# Altium PCB custom_pcb_layout.pcbdoc
Units mil, origin at the board's own origin, x right, y up, seen from the top; angles counter-clockwise.
Board outline 3010 x 1910 mil, 2 copper layers (Top Layer, Bottom Layer); 32 components, 17 nets, 114 pads, 42 vias.
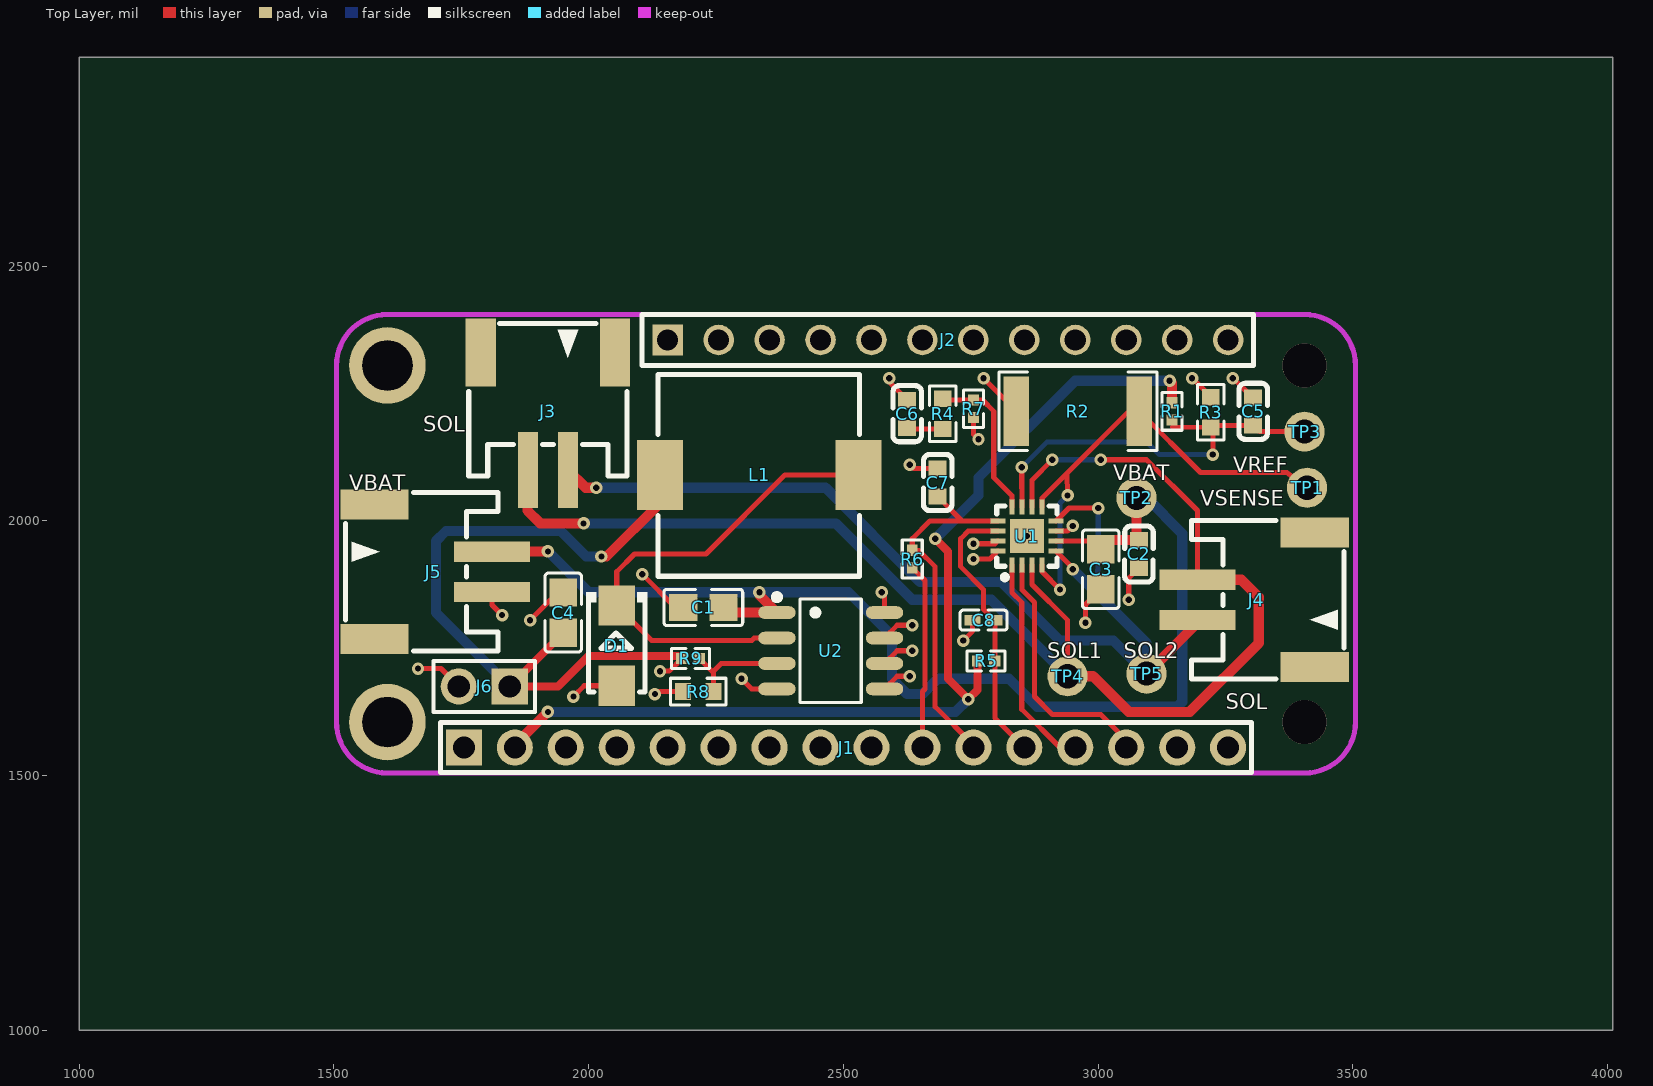
[diagram p0: Top Layer view]
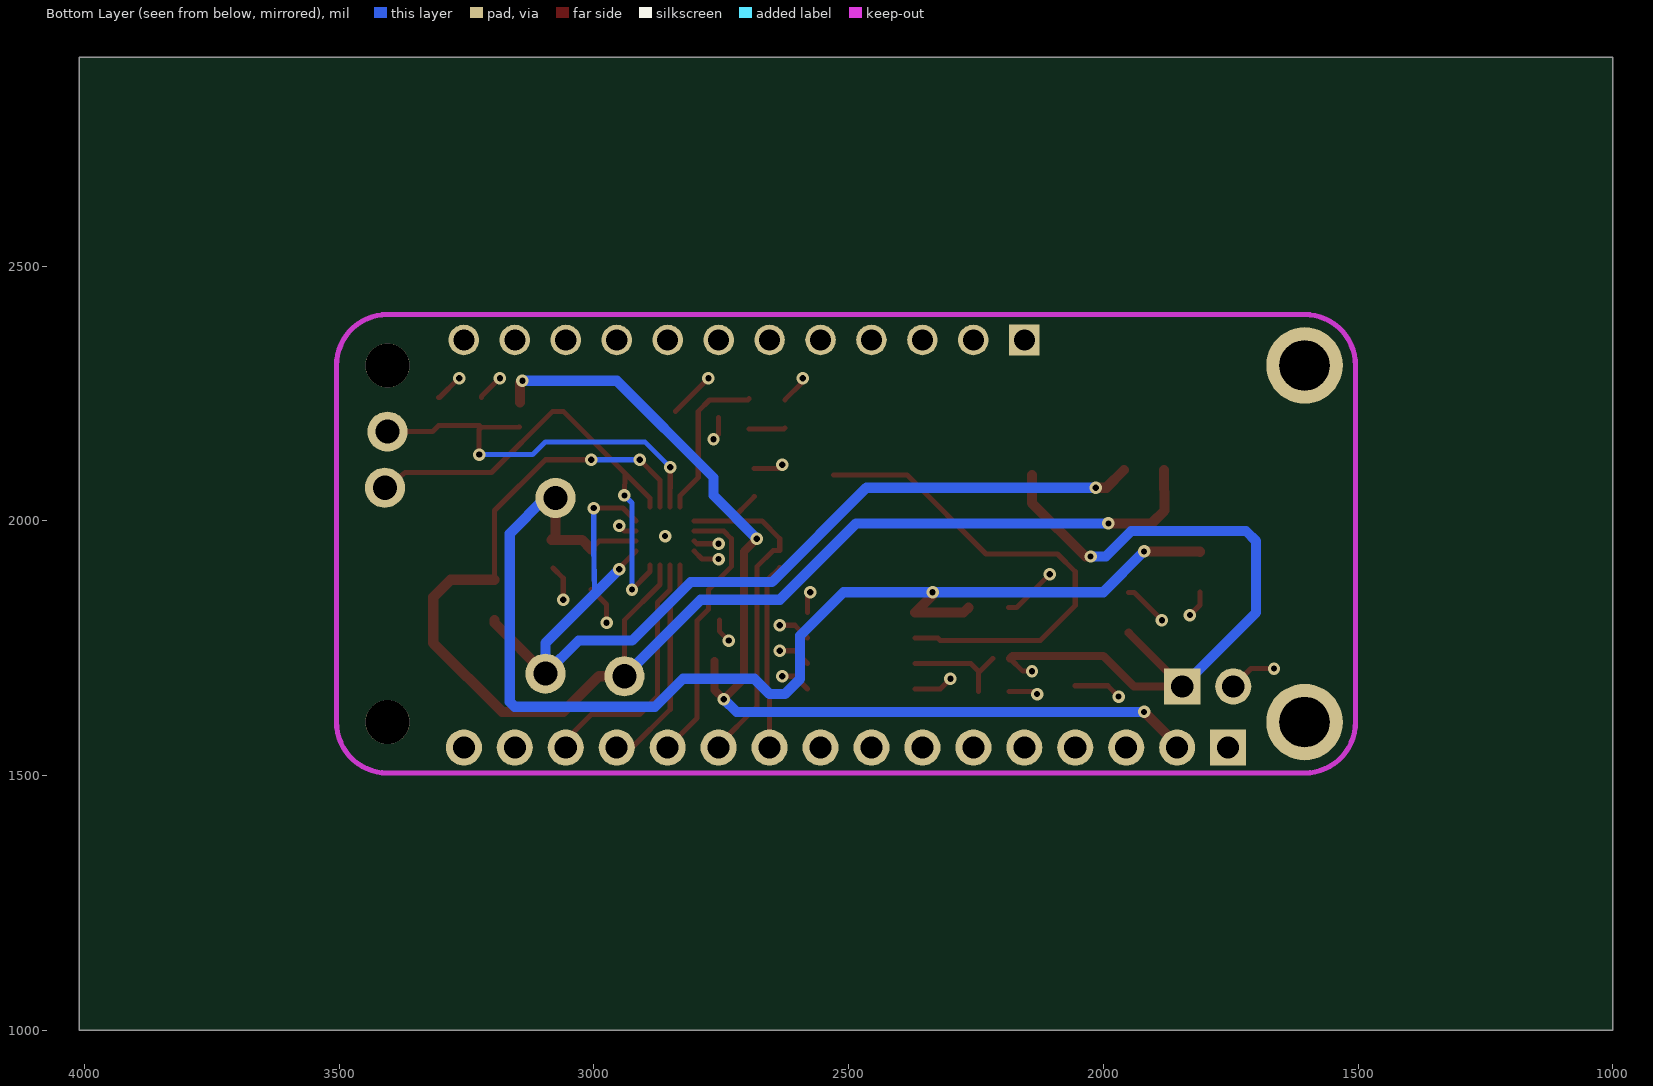
[diagram p1: Bottom Layer view, seen from below]

## Layer stack, top to bottom
Top Layer: signal copper (thickness not stored)
Dielectric: dielectric 12.6, FR-4, Dk 4.8
Bottom Layer: signal copper (thickness not stored)

## Board outline
4010,1000 1000,1000 1000,2910 4010,2910

## Components (designator, comment, footprint, x,y, rotation, side; value= is the part's Value field where it differs from the comment)
C1 "22uF" C0805 2225,1830 r180 top
C2 "2.2uF" C0603 3080,1935 r90 top
C3 "22uF" C0805 3005,1905 r90 top
C4 "22uF" C0805 1950,1820 r270 top
C5 "10nF" C0603 3304.24,2214.66 r270 top
C6 "22nF" C0603 2625,2210 r270 top
C7 "10nF" C0603 2685,2075 r270 top
C8 "1nF" C0402 2775,1805 r0 top
D1 "SS24_C908678" SMA_L4.2-W2.7-LS5.1-RD 2055,1755 r270 top
J1 "ZX-PZ2.54-1-16PZZ" HDR-TH_16P-P2.54-V-M-2 2505.04,1554.99 r0 top
J2 "2541WV-12P" HDR-TH_12P-P2.54-V-M 2705,2355 r0 top
J3 "S2B-PH-SM4-TB(LF)(SN)" CONN-SMD_P2.00_S2B-PH-SM4-TB-LF-SN 1920,2215 r180 top
J4 "S2B-PH-SM4-TB(LF)(SN)" CONN-SMD_P2.00_S2B-PH-SM4-TB-LF-SN 3310,1845 r90 top
J5 "S2B-PH-SM4-TB(LF)(SN)" CONN-SMD_P2.00_S2B-PH-SM4-TB-LF-SN 1695,1900 r270 top
J6 "PZ2.54-1*2" HDR-TH_2P-P2.54-V-M-3 1795,1675 r180 top
L1 "39uH" IND-SMD_L10.1-W10.0 2335,2090 r0 top
R1 "30kΩ" R0402 3145,2215 r90 top
R2 "330mΩ" R2512 2960,2215 r0 top
R3 "10kΩ" R0603 3220.79,2212.89 r270 top
R4 "1kΩ" R0603 2695,2210 r90 top
R5 "18kΩ" R0402 2780,1725 r180 top
R6 "18kΩ" R0402 2635,1925 r90 top
R7 "47kΩ" R0402 2755,2220 r90 top
R8 "1kΩ" R0603 2215,1665 r0 top
R9 "2.2kΩ" R0402 2200,1730 r180 top
TP1 "PG2.0-4.5-0.8T" TESTPOINT-TH_PG2.0-4.5-0.8T 3410,2065 r0 top
TP2 "PG2.0-4.5-0.8T" TESTPOINT-TH_PG2.0-4.5-0.8T 3075,2045 r0 top
TP3 "PG2.0-4.5-0.8T" TESTPOINT-TH_PG2.0-4.5-0.8T 3405,2175 r0 top
TP4 "PG2.0-4.5-0.8T" TESTPOINT-TH_PG2.0-4.5-0.8T 2940,1695 r0 top
TP5 "PG2.0-4.5-0.8T" TESTPOINT-TH_PG2.0-4.5-0.8T 3095,1700 r0 top
U1 "STSPIN250" TQFN-16_L3.0-W3.0-P0.50-BL-EP1.7 2860,1970 r0 top
U2 "AP1509-SG-13" SOP-8_L4.9-W3.9-P1.27-LS6.0-BL 2475,1745 r270 top

## Footprints (in the part's own frame and the unit in brackets; to place one, negate y for a bottom-side part, rotate by r counter-clockwise, add the part's x,y. Pads: shape width x height; smd on the part's side, far side on the other; paste and mask are expansions set on the pad)
C0402 [mm]
  rect 0.79x0.54 smd paste-100 mask+0.051: 1(-0.545,0) 2(0.545,0)
  silkscreen extent -1.17,-0.5 1.17,0.5
C0603 [mm]
  rect 0.8x0.9 smd paste+0 mask+0.051: 1(-0.7,0) 2(0.7,0)
  silkscreen extent -1.41,-0.71 1.39,0.72
C0805 [mm]
  rect 1.41x1.35 smd paste-100 mask+0.051: 1(-1,0) 2(1,0)
  silkscreen extent -1.96,-0.9 1.96,0.9
CONN-SMD_P2.00_S2B-PH-SM4-TB-LF-SN [mm]
  rect 1x3.8 smd paste+0 mask+0.051: 1(-1,2.925) 2(1,2.925)
  rect 1.5x3.4 smd paste+0 mask+0.051: 3(3.35,-2.925) 4(-3.35,-2.925)
  silkscreen extent -3.95,-4.37 3.95,3.22
HDR-TH_2P-P2.54-V-M-3 [mm]
  rect 1.8x1.8 hole 1.1 paste+0 mask+0.051: 1(-1.27,0)
  round 1.8 hole 1.1 paste+0 mask+0.051: 2(1.27,0)
  silkscreen extent -2.54,-1.27 2.54,1.27
HDR-TH_12P-P2.54-V-M [mil]
  rect 60x60 hole 41.34 paste+0 mask+2: 1(-550,0)
  round 60 hole 41.34 paste+0 mask+2: 2(-450,0) 3(-350,0) 4(-250,0) 5(-150,0) 6(-50,0) 7(50,0) 8(150,0) 9(250,0) 10(350,0) 11(450,0) 12(550,0)
  silkscreen extent -600,-50 600,50
HDR-TH_16P-P2.54-V-M-2 [mm]
  rect 1.8x1.8 hole 1.1 paste+0 mask+0.051: 1(-19.05,0)
  round 1.8 hole 1.1 paste+0 mask+0.051: 2(-16.51,0) 3(-13.97,0) 4(-11.43,0) 5(-8.89,0) 6(-6.35,0) 7(-3.81,0) 8(-1.27,0) 9(1.27,0) 10(3.81,0) 11(6.35,0) 12(8.89,0) 13(11.43,0) 14(13.97,0) 15(16.51,0) 16(19.05,0)
  silkscreen extent -20.22,-1.25 20.22,1.25
IND-SMD_L10.1-W10.0 [mm]
  rect 2.3x3.5 smd paste+0 mask+0.051: 1(-4.95,0) 2(4.95,0)
  silkscreen extent -5.05,-5.05 5,5
R0402 [mm]
  rect 0.566x0.54 smd paste-100 mask+0.051: 1(-0.433,0) 2(0.433,0)
  silkscreen extent -0.94,-0.5 0.94,0.5
R0603 [mil]
  rect 31.75x34.02 smd paste-3937.01 mask+2: 1(-29.66,0) 2(29.65,0)
  silkscreen extent -55,-26 55,26
R2512 [mil]
  rect 50.49x136.06 smd paste-3937.01 mask+2: 1(-120.72,0) 2(120.72,0)
  silkscreen extent -155,-77 155,77
SMA_L4.2-W2.7-LS5.1-RD [mm]
  rect 2x1.8 smd paste+0 mask+0.051: 1(-2,0) 2(2,0)
  silkscreen extent -2.67,-1.52 2.3,1.52
SOP-8_L4.9-W3.9-P1.27-LS6.0-BL [mm]
  oval 0.63x1.865 smd paste+0 mask+0.051: 1(-1.905,-2.682) 2(-0.635,-2.682) 3(0.635,-2.682) 4(1.905,-2.682) 5(1.905,2.682) 6(0.635,2.682) 7(-0.635,2.682) 8(-1.905,2.682)
  silkscreen extent -2.82,-2.83 2.58,1.52
TESTPOINT-TH_PG2.0-4.5-0.8T [mm]
  round 2 hole 1.2 paste+0 mask+0.05: 1(0,0)
TQFN-16_L3.0-W3.0-P0.50-BL-EP1.7 [mm]
  rect 0.25x0.75 smd paste-100 mask+0.051: 1(-0.748,-1.45) 2(-0.249,-1.45) 3(0.252,-1.45) 4(0.751,-1.45) 9(0.75,1.45) 10(0.25,1.45) 11(-0.25,1.45) 12(-0.749,1.45)
  rect 0.75x0.25 smd paste-100 mask+0.051: 5(1.45,-0.75) 6(1.45,-0.25) 7(1.45,0.25) 8(1.45,0.75) 13(-1.45,0.75) 14(-1.45,0.25) 15(-1.45,-0.25) 16(-1.45,-0.75)
  rect 1.7x1.7 smd paste-100 mask+0.051: 17(0,0)
  silkscreen extent -1.5,-2.17 1.5,1.5

## Free pads (board coordinates)
  round 150 hole 98.42 slot 98.62 at 0 deg paste+0 mask+2: P$1(1605,1605) P$1(1605,2305)
  round 86.62 hole 86.62 unplated paste+0: ""(3405,1605) ""(3405,2305)

## Via types
v1: diameter 24.41, hole 12.2, Top Layer to Bottom Layer, tented both sides, 42 vias

## Nets (pads, with @x,y where several pads share a name; then routed paths per layer and width w, separated by ;. In a path a pad name is that pad's centre, name@x,y a point inside that pad or via, vN(x,y) a via of type N, cw(c..) or ccw(c..) an arc to the next point about the centre after c; other vN are vias at no path point)
+3.3V: J1.2 R1.2 R5.2 | length 2375.6
  Top Layer w16: v1(2680,1965) 2705,1940 2705,1690 v1(2745,1650) 2762.96,1667.96 R5.2
  Top Layer w20: J1.2 1855,1560 v1(1920,1625) ; v1(3140,2275) 3145,2270 R1.2
  Bottom Layer w10: v1(1920,1625) 2272.5,1625 2285,1625
  Bottom Layer w20: v1(1920,1625) 2720,1625 v1(2745,1650) ; v1(2680,1965) 2765,2050 2765,2085 2955,2275 v1(3140,2275)
C6_2: C6.2 R4.1 | length 70.9
  Top Layer w10: C6.2 2627.1,2180.34 R4.1
D1_1: D1.1 L1.2 U2.2 | length 964.8
  Top Layer w10: U2.2 2325,1770 2320,1765 2123.74,1765 D1.1 2055,1900 2090,1935 2230,1935 2385,2090 L1.2
EN: J1.10 R6.1 | length 365.3
  Top Layer w10: R6.1@2635,1907.9 2660,1882.9 2660,1670 2655,1665 J1.10
FAULT: C7.2 J1.11 R6.2 U1.13 | length 752.1
  Top Layer w10: R6.2 2648,1942 2680,1910 2680,1635 2755,1560 J1.11 ; R6.2 2635,1965 2669.53,1999.53 U1.13 ; C7.2 2732.91,1999.53 2767.72,1999.53
GND: C1.2 C2.1 C3.1 C4.1 C5.1 C6.1 C7.1 C8.1 D1.2 J1.4 J5.2 J6.2 R2.1 R3.1 R7.1 R8.1 U1.7 U1.15 U1.16 U1.17 U2.4 U2.5 U2.6 U2.7 U2.8 | length 1502.8
  Top Layer w10: v1(1665,1710) 1710,1710 J6.2 ; J5.2 1810.16,1834.84 v1(1830,1815) ; v1(1885,1805) 1939.37,1859.37 C4.1 ; v1(1970,1655) 1991.27,1676.27 D1.2 ; v1(2105,1895) 2170,1830 C1.2 ; v1(2130,1660) 2135,1665 R8.1 ; v1(2300,1690) 2320,1670 U2.4 ; v1(2575,1860) 2580.61,1854.39 U2.8 ; U2.5 2605.61,1695 v1(2630,1695) ; U2.6 2605.61,1745 v1(2635,1745) ; U2.7 2605.61,1795 v1(2635,1795) ; v1(2590,2280) 2590,2272.56 C6.1 ; v1(2630,2110) 2637.44,2102.56 C7.1 ; v1(2735,1765) 2753.54,1783.54 C8.1 ; v1(2755,1925) 2787.44,1925 U1.16 ; v1(2755,1955) 2797.76,1955 U1.15 ; R7.1 2755,2170 v1(2765,2160) ; v1(2775,2280) 2839.28,2215.72 R2.1 ; U1.7 2939.85,1979.85 v1(2950,1990) ; v1(2975,1800) 2975,1835.63 C3.1 ; v1(3060,1845) 3060,1887.44 C2.1 ; v1@3185,2280 3220.79,2244.21 R3.1 ; v1@3265,2280 3302.79,2242.21 C5.1
  other v1: 2860.01,1970 3184.24,2279.66 3264.24,2279.66
PH: J1.13 U1.1 | length 427
  Top Layer w10: U1.1 2830.54,1859.46 2850,1840 2850,1630 2925,1555 J1.13
PWM: J1.14 U1.2 | length 498.4
  Top Layer w10: U1.2 2850.22,1864.78 2875,1840 2875,1655 2910,1620 3005,1620 3055,1570 J1.14
SOL_1: J3.2 J4.2 TP4.1 U1.3 U1.10 | length 2777.2
  Top Layer w10: U1.10 2869.84,2079.84 v1(2910,2120) ; U1.3 2869.91,1875.09 2940,1805 TP4.1 ; v1(3005,2120) 3095,2120 3194.84,2020.16 J4.2
  Top Layer w20: J3.2 1880,2020 1905,1995 v1(1990,1995) ; TP4.1 2990,1695 3060,1625 3180,1625 3315,1760 3315,1850 3280.63,1884.37 J4.2
  Bottom Layer w10: v1(2910,2120) v1(3005,2120)
  Bottom Layer w20: v1(1990,1995) 2485,1995 2635,1845 2790,1845 TP4.1
SOL_2: J3.1 J4.1 TP5.1 U1.5 U1.8 | length 2024.9
  Top Layer w10: U1.5 2950,1907.56 v1(2950,1905) ; U1.8 2942.55,2025 v1(3000,2025)
  Top Layer w20: J3.1 1994.21,2065 v1(2015,2065) ; TP5.1 3194.84,1799.84 J4.1
  Bottom Layer w10: 2998.75,1856 3000,1955 v1(3000,2025)
  Bottom Layer w20: v1(2015,2065) 2465,2065 2650,1880 2810,1880 2925,1765 3030,1765 TP5.1 3095,1760 v1(2950,1905)
STBY: C8.2 J1.12 R5.1 U1.14 | length 540.8
  Top Layer w10: U1.14@2802.92,1979.85 2744.85,1979.85 2730,1965 2730,1910 2775,1865 2775,1826.46 C8.2 2797.05,1804.41 2797.05,1725 2797.05,1612.95 J1.12
TOFF: R4.2 R7.2 U1.12 | length 312.8
  Top Layer w10: R4.2 2697.62,2237.04 R7.2 2772.96,2237.04 2795,2215 2795,2085 2830.5,2049.5 U1.12
U1_4: R2.2 TP1.1 U1.4 U1.9 | length 966.1
  Top Layer w10: U1.9 2889.5,2044.5 2939.1,2094.1 ; U1.4 2889.59,1900.41 v1(2925,1865) ; v1(2940,2050) 2939.1,2094.1 ; TP1.1 3370,2095 3200.72,2095 R2.2 3060,2215 2939.1,2094.1
  Bottom Layer w10: v1(2925,1865) 2925,2035 v1(2940,2050)
U1_11: C5.2 R1.1 R3.2 TP3.1 U1.11 | length 842
  Top Layer w10: v1(2850,2105) 2850,2065 2850.16,2064.84 ; 3146.4,2183.8 R3.2 ; v1(3225,2130) 3225,2179.03 R3.2 3224.66,2187.1 C5.2 3316.34,2175 TP3.1 ; 2850.16,2064.84 U1.11 2850.16,2064.84
  Bottom Layer w10: v1(2850,2105) 2900,2155 3095,2155 3120,2130 v1(3225,2130)
U2_3: R8.2 R9.1 U2.3 | length 247.2
  Top Layer w10: R9.1 2244.66,1702.38 R8.2 ; R8.2 2244.7,1704.7 2260,1720 U2.3
V_ESP32: C4.2 J6.1 L1.1 R9.2 | length 1480
  Top Layer w10: v1(2140,1705) 2157.96,1705 R9.2
  Top Layer w16: C4.2 1950,1780 J6.1 1940,1675 2000,1735 2178,1735 R9.2
  Top Layer w20: v1(2025,1930) 2035,1930 2140.11,2035.11 L1.1
  Bottom Layer w20: J6.1 1700,1820 1700,1960 1720,1980 1945,1980 1995,1930 v1(2025,1930)
VBAT: C1.1 C2.2 C3.2 J5.1 TP2.1 U1.6 U2.1 | length 2437.4
  Top Layer w10: U1.6 2989.21,1960.16 C3.2
  Top Layer w20: J5.1 v1(1920,1940) ; C1.1 2274.37,1820 U2.1 2335,1854.39 v1(2335,1860) ; C3.2 3023.19,1962.56 C2.2 3082.56,1962.56 3075,1970.12 TP2.1
  Bottom Layer w20: v1(1920,1940) 2000,1860 v1(2335,1860) 2510,1860 2595,1775 2595,1690 2625,1660 2655,1660 2685,1690 2825,1690 2880,1635 3155,1635 3165,1645 3165,1975 3095,2045 TP2.1
pads on no net: J1.1 J1.3 J1.5 J1.6 J1.7 J1.8 J1.9 J1.15 J1.16 J2.1 J2.2 J2.3 J2.4 J2.5 J2.6 J2.7 J2.8 J2.9 J2.10 J2.11 J2.12 J3.3 J3.4 J4.3 J4.4 J5.3 J5.4

## Polygon pours and split planes (outlines as drawn)
GND on Internal Plane 2 (split plane): 229 vertices, not listed, extent 1505,1505 3505,2405
GND on Internal Plane 2 (split plane): 144 vertices, not listed, extent 3213.52,1513.46 3296.57,1596.52
GND on Internal Plane 2 (split plane): 144 vertices, not listed, extent 3113.52,1513.46 3196.57,1596.52
GND on Internal Plane 2 (split plane): 144 vertices, not listed, extent 3013.52,1513.46 3096.57,1596.52
GND on Internal Plane 2 (split plane): 144 vertices, not listed, extent 2913.52,1513.46 2996.57,1596.52
GND on Internal Plane 2 (split plane): 144 vertices, not listed, extent 2813.52,1513.46 2896.57,1596.52
GND on Internal Plane 2 (split plane): 144 vertices, not listed, extent 2713.52,1513.46 2796.57,1596.52
GND on Internal Plane 2 (split plane): 144 vertices, not listed, extent 2613.52,1513.46 2696.57,1596.52
GND on Internal Plane 2 (split plane): 144 vertices, not listed, extent 2513.52,1513.46 2596.57,1596.52
GND on Internal Plane 2 (split plane): 144 vertices, not listed, extent 2413.52,1513.46 2496.57,1596.52
GND on Internal Plane 2 (split plane): 144 vertices, not listed, extent 2313.52,1513.46 2396.57,1596.52
GND on Internal Plane 2 (split plane): 144 vertices, not listed, extent 2213.52,1513.46 2296.57,1596.52
GND on Internal Plane 2 (split plane): 144 vertices, not listed, extent 2113.52,1513.46 2196.57,1596.52
GND on Internal Plane 2 (split plane): 144 vertices, not listed, extent 1913.52,1513.46 1996.57,1596.52
GND on Internal Plane 2 (split plane): 144 vertices, not listed, extent 1813.52,1513.46 1896.57,1596.52
GND on Internal Plane 2 (split plane): 121 vertices, not listed, extent 1713.61,1513.56 1796.47,1596.42
GND on Internal Plane 2 (split plane): 20 vertices, not listed, extent 2017.49,1517.43 2037.32,1537.27
GND on Internal Plane 2 (split plane): 19 vertices, not listed, extent 2072.76,1517.43 2092.6,1537.27
GND on Internal Plane 2 (split plane): 201 vertices, not listed, extent 1523.9,1523.9 1686.1,1686.1
GND on Internal Plane 2 (split plane): 157 vertices, not listed, extent 3355.59,1555.59 3454.41,1654.41
GND on Internal Plane 2 (split plane): 19 vertices, not listed, extent 2072.76,1572.71 2092.6,1592.55
GND on Internal Plane 2 (split plane): 20 vertices, not listed, extent 2017.49,1572.71 2037.32,1592.55
GND on Internal Plane 2 (split plane): 96 vertices, not listed, extent 1901.7,1606.7 1938.31,1643.3
GND on Internal Plane 2 (split plane): 96 vertices, not listed, extent 2726.7,1631.7 2763.3,1668.3
GND on Internal Plane 2 (split plane): 121 vertices, not listed, extent 1803.57,1633.57 1886.43,1716.43
GND on Internal Plane 2 (split plane): 20 vertices, not listed, extent 1707.45,1637.44 1727.28,1657.28
GND on Internal Plane 2 (split plane): 19 vertices, not listed, extent 1762.72,1637.44 1782.56,1657.28
GND on Internal Plane 2 (split plane): 150 vertices, not listed, extent 2894.54,1649.53 2985.47,1740.47
GND on Internal Plane 2 (split plane): 150 vertices, not listed, extent 3049.54,1654.53 3140.47,1745.47
GND on Internal Plane 2 (split plane): 96 vertices, not listed, extent 2121.7,1686.7 2158.3,1723.3
GND on Internal Plane 2 (split plane): 19 vertices, not listed, extent 1762.72,1692.72 1782.56,1712.56
GND on Internal Plane 2 (split plane): 20 vertices, not listed, extent 1707.45,1692.72 1727.28,1712.56
GND on Internal Plane 2 (split plane): 96 vertices, not listed, extent 2316.7,1841.7 2353.3,1878.3
GND on Internal Plane 2 (split plane): 96 vertices, not listed, extent 2906.7,1846.7 2943.3,1883.3
GND on Internal Plane 2 (split plane): 96 vertices, not listed, extent 2931.7,1886.7 2968.3,1923.3
GND on Internal Plane 2 (split plane): 96 vertices, not listed, extent 2006.7,1911.7 2043.31,1948.3
GND on Internal Plane 2 (split plane): 96 vertices, not listed, extent 1901.7,1921.7 1938.31,1958.3
GND on Internal Plane 2 (split plane): 96 vertices, not listed, extent 2661.7,1946.7 2698.3,1983.3
GND on Internal Plane 2 (split plane): 96 vertices, not listed, extent 1971.7,1976.7 2008.31,2013.3
GND on Internal Plane 2 (split plane): 150 vertices, not listed, extent 3029.54,1999.53 3120.47,2090.47
GND on Internal Plane 2 (split plane): 96 vertices, not listed, extent 2981.7,2006.7 3018.3,2043.3
GND on Internal Plane 2 (split plane): 150 vertices, not listed, extent 3364.54,2019.53 3455.47,2110.47
GND on Internal Plane 2 (split plane): 96 vertices, not listed, extent 2921.7,2031.7 2958.3,2068.3
GND on Internal Plane 2 (split plane): 96 vertices, not listed, extent 1996.7,2046.7 2033.31,2083.3
GND on Internal Plane 2 (split plane): 96 vertices, not listed, extent 2831.7,2086.7 2868.3,2123.3
GND on Internal Plane 2 (split plane): 96 vertices, not listed, extent 2986.7,2101.7 3023.3,2138.3
GND on Internal Plane 2 (split plane): 96 vertices, not listed, extent 2891.7,2101.7 2928.3,2138.3
GND on Internal Plane 2 (split plane): 96 vertices, not listed, extent 3206.7,2111.7 3243.3,2148.3
GND on Internal Plane 2 (split plane): 150 vertices, not listed, extent 3359.54,2129.53 3450.47,2220.47
GND on Internal Plane 2 (split plane): 201 vertices, not listed, extent 1523.9,2223.9 1686.1,2386.1
GND on Internal Plane 2 (split plane): 157 vertices, not listed, extent 3355.59,2255.59 3454.41,2354.41
GND on Internal Plane 2 (split plane): 96 vertices, not listed, extent 3121.7,2256.7 3158.3,2293.3
GND on Internal Plane 2 (split plane): 134 vertices, not listed, extent 2218.91,2318.9 2291.1,2391.1
GND on Internal Plane 2 (split plane): 134 vertices, not listed, extent 2318.91,2318.9 2391.1,2391.1
GND on Internal Plane 2 (split plane): 134 vertices, not listed, extent 2418.91,2318.9 2491.1,2391.1
GND on Internal Plane 2 (split plane): 134 vertices, not listed, extent 2518.91,2318.9 2591.1,2391.1
GND on Internal Plane 2 (split plane): 134 vertices, not listed, extent 2618.91,2318.9 2691.1,2391.1
GND on Internal Plane 2 (split plane): 134 vertices, not listed, extent 2718.91,2318.9 2791.1,2391.1
GND on Internal Plane 2 (split plane): 134 vertices, not listed, extent 2818.91,2318.9 2891.1,2391.1
GND on Internal Plane 2 (split plane): 134 vertices, not listed, extent 2918.91,2318.9 2991.1,2391.1
GND on Internal Plane 2 (split plane): 134 vertices, not listed, extent 3018.91,2318.9 3091.1,2391.1
GND on Internal Plane 2 (split plane): 134 vertices, not listed, extent 3118.91,2318.9 3191.1,2391.1
GND on Internal Plane 2 (split plane): 134 vertices, not listed, extent 3218.91,2318.9 3291.1,2391.1
GND on Internal Plane 2 (split plane): 121 vertices, not listed, extent 2119,2319 2191,2391
GND on Internal Plane 1 (split plane): 229 vertices, not listed, extent 1505,1505 3505,2405
GND on Internal Plane 1 (split plane): 144 vertices, not listed, extent 3213.52,1513.46 3296.57,1596.52
GND on Internal Plane 1 (split plane): 144 vertices, not listed, extent 3113.52,1513.46 3196.57,1596.52
GND on Internal Plane 1 (split plane): 144 vertices, not listed, extent 3013.52,1513.46 3096.57,1596.52
GND on Internal Plane 1 (split plane): 144 vertices, not listed, extent 2913.52,1513.46 2996.57,1596.52
GND on Internal Plane 1 (split plane): 144 vertices, not listed, extent 2813.52,1513.46 2896.57,1596.52
GND on Internal Plane 1 (split plane): 144 vertices, not listed, extent 2713.52,1513.46 2796.57,1596.52
GND on Internal Plane 1 (split plane): 144 vertices, not listed, extent 2613.52,1513.46 2696.57,1596.52
GND on Internal Plane 1 (split plane): 144 vertices, not listed, extent 2513.52,1513.46 2596.57,1596.52
GND on Internal Plane 1 (split plane): 144 vertices, not listed, extent 2413.52,1513.46 2496.57,1596.52
GND on Internal Plane 1 (split plane): 144 vertices, not listed, extent 2313.52,1513.46 2396.57,1596.52
GND on Internal Plane 1 (split plane): 144 vertices, not listed, extent 2213.52,1513.46 2296.57,1596.52
GND on Internal Plane 1 (split plane): 144 vertices, not listed, extent 2113.52,1513.46 2196.57,1596.52
GND on Internal Plane 1 (split plane): 144 vertices, not listed, extent 1913.52,1513.46 1996.57,1596.52
GND on Internal Plane 1 (split plane): 144 vertices, not listed, extent 1813.52,1513.46 1896.57,1596.52
GND on Internal Plane 1 (split plane): 121 vertices, not listed, extent 1713.61,1513.56 1796.47,1596.42
GND on Internal Plane 1 (split plane): 20 vertices, not listed, extent 2017.49,1517.43 2037.32,1537.27
GND on Internal Plane 1 (split plane): 19 vertices, not listed, extent 2072.76,1517.43 2092.6,1537.27
GND on Internal Plane 1 (split plane): 201 vertices, not listed, extent 1523.9,1523.9 1686.1,1686.1
GND on Internal Plane 1 (split plane): 157 vertices, not listed, extent 3355.59,1555.59 3454.41,1654.41
GND on Internal Plane 1 (split plane): 19 vertices, not listed, extent 2072.76,1572.71 2092.6,1592.55
GND on Internal Plane 1 (split plane): 20 vertices, not listed, extent 2017.49,1572.71 2037.32,1592.55
GND on Internal Plane 1 (split plane): 96 vertices, not listed, extent 1901.7,1606.7 1938.31,1643.3
GND on Internal Plane 1 (split plane): 96 vertices, not listed, extent 2726.7,1631.7 2763.3,1668.3
GND on Internal Plane 1 (split plane): 121 vertices, not listed, extent 1803.57,1633.57 1886.43,1716.43
GND on Internal Plane 1 (split plane): 20 vertices, not listed, extent 1707.45,1637.44 1727.28,1657.28
GND on Internal Plane 1 (split plane): 19 vertices, not listed, extent 1762.72,1637.44 1782.56,1657.28
GND on Internal Plane 1 (split plane): 150 vertices, not listed, extent 2894.54,1649.53 2985.47,1740.47
GND on Internal Plane 1 (split plane): 150 vertices, not listed, extent 3049.54,1654.53 3140.47,1745.47
GND on Internal Plane 1 (split plane): 96 vertices, not listed, extent 2121.7,1686.7 2158.3,1723.3
GND on Internal Plane 1 (split plane): 19 vertices, not listed, extent 1762.72,1692.72 1782.56,1712.56
GND on Internal Plane 1 (split plane): 20 vertices, not listed, extent 1707.45,1692.72 1727.28,1712.56
GND on Internal Plane 1 (split plane): 96 vertices, not listed, extent 2316.7,1841.7 2353.3,1878.3
GND on Internal Plane 1 (split plane): 96 vertices, not listed, extent 2906.7,1846.7 2943.3,1883.3
GND on Internal Plane 1 (split plane): 96 vertices, not listed, extent 2931.7,1886.7 2968.3,1923.3
GND on Internal Plane 1 (split plane): 96 vertices, not listed, extent 2006.7,1911.7 2043.31,1948.3
GND on Internal Plane 1 (split plane): 96 vertices, not listed, extent 1901.7,1921.7 1938.31,1958.3
GND on Internal Plane 1 (split plane): 96 vertices, not listed, extent 2661.7,1946.7 2698.3,1983.3
GND on Internal Plane 1 (split plane): 96 vertices, not listed, extent 1971.7,1976.7 2008.31,2013.3
GND on Internal Plane 1 (split plane): 150 vertices, not listed, extent 3029.54,1999.53 3120.47,2090.47
GND on Internal Plane 1 (split plane): 96 vertices, not listed, extent 2981.7,2006.7 3018.3,2043.3
GND on Internal Plane 1 (split plane): 150 vertices, not listed, extent 3364.54,2019.53 3455.47,2110.47
GND on Internal Plane 1 (split plane): 96 vertices, not listed, extent 2921.7,2031.7 2958.3,2068.3
GND on Internal Plane 1 (split plane): 96 vertices, not listed, extent 1996.7,2046.7 2033.31,2083.3
GND on Internal Plane 1 (split plane): 96 vertices, not listed, extent 2831.7,2086.7 2868.3,2123.3
GND on Internal Plane 1 (split plane): 96 vertices, not listed, extent 2986.7,2101.7 3023.3,2138.3
GND on Internal Plane 1 (split plane): 96 vertices, not listed, extent 2891.7,2101.7 2928.3,2138.3
GND on Internal Plane 1 (split plane): 96 vertices, not listed, extent 3206.7,2111.7 3243.3,2148.3
GND on Internal Plane 1 (split plane): 150 vertices, not listed, extent 3359.54,2129.53 3450.47,2220.47
GND on Internal Plane 1 (split plane): 201 vertices, not listed, extent 1523.9,2223.9 1686.1,2386.1
GND on Internal Plane 1 (split plane): 157 vertices, not listed, extent 3355.59,2255.59 3454.41,2354.41
GND on Internal Plane 1 (split plane): 96 vertices, not listed, extent 3121.7,2256.7 3158.3,2293.3
GND on Internal Plane 1 (split plane): 134 vertices, not listed, extent 2218.91,2318.9 2291.1,2391.1
GND on Internal Plane 1 (split plane): 134 vertices, not listed, extent 2318.91,2318.9 2391.1,2391.1
GND on Internal Plane 1 (split plane): 134 vertices, not listed, extent 2418.91,2318.9 2491.1,2391.1
GND on Internal Plane 1 (split plane): 134 vertices, not listed, extent 2518.91,2318.9 2591.1,2391.1
GND on Internal Plane 1 (split plane): 134 vertices, not listed, extent 2618.91,2318.9 2691.1,2391.1
GND on Internal Plane 1 (split plane): 134 vertices, not listed, extent 2718.91,2318.9 2791.1,2391.1
GND on Internal Plane 1 (split plane): 134 vertices, not listed, extent 2818.91,2318.9 2891.1,2391.1
GND on Internal Plane 1 (split plane): 134 vertices, not listed, extent 2918.91,2318.9 2991.1,2391.1
GND on Internal Plane 1 (split plane): 134 vertices, not listed, extent 3018.91,2318.9 3091.1,2391.1
GND on Internal Plane 1 (split plane): 134 vertices, not listed, extent 3118.91,2318.9 3191.1,2391.1
GND on Internal Plane 1 (split plane): 134 vertices, not listed, extent 3218.91,2318.9 3291.1,2391.1
GND on Internal Plane 1 (split plane): 121 vertices, not listed, extent 2119,2319 2191,2391

## Keep-outs
Keep-Out Layer:
  lines w10: 1505,1605 ccw(c1605,1605) 1605,1505 ; 1505,2305 cw(c1605,2305) 1605,2405 ; 3405,1505 ccw(c3405,1605) 3505,1605 ; 3405,2405 cw(c3405,2305) 3505,2305

## Silkscreen, mask and mechanical layers (free items; w line width, h text height)
Top Overlay:
  text "SOL" at 1675,2175 h30
  text "VREF" at 3265,2095 h30
  text "VBAT" at 3030,2080 h30
  text "VBAT" at 1530,2060 h30
  text "VSENSE" at 3200,2030 h30
  text "SOL1" at 2900,1730 h30
  text "SOL2" at 3050,1730 h30
  text "SOL" at 3250,1630 h30